# EAGLE board untitled (EAGLE 9.6.2)
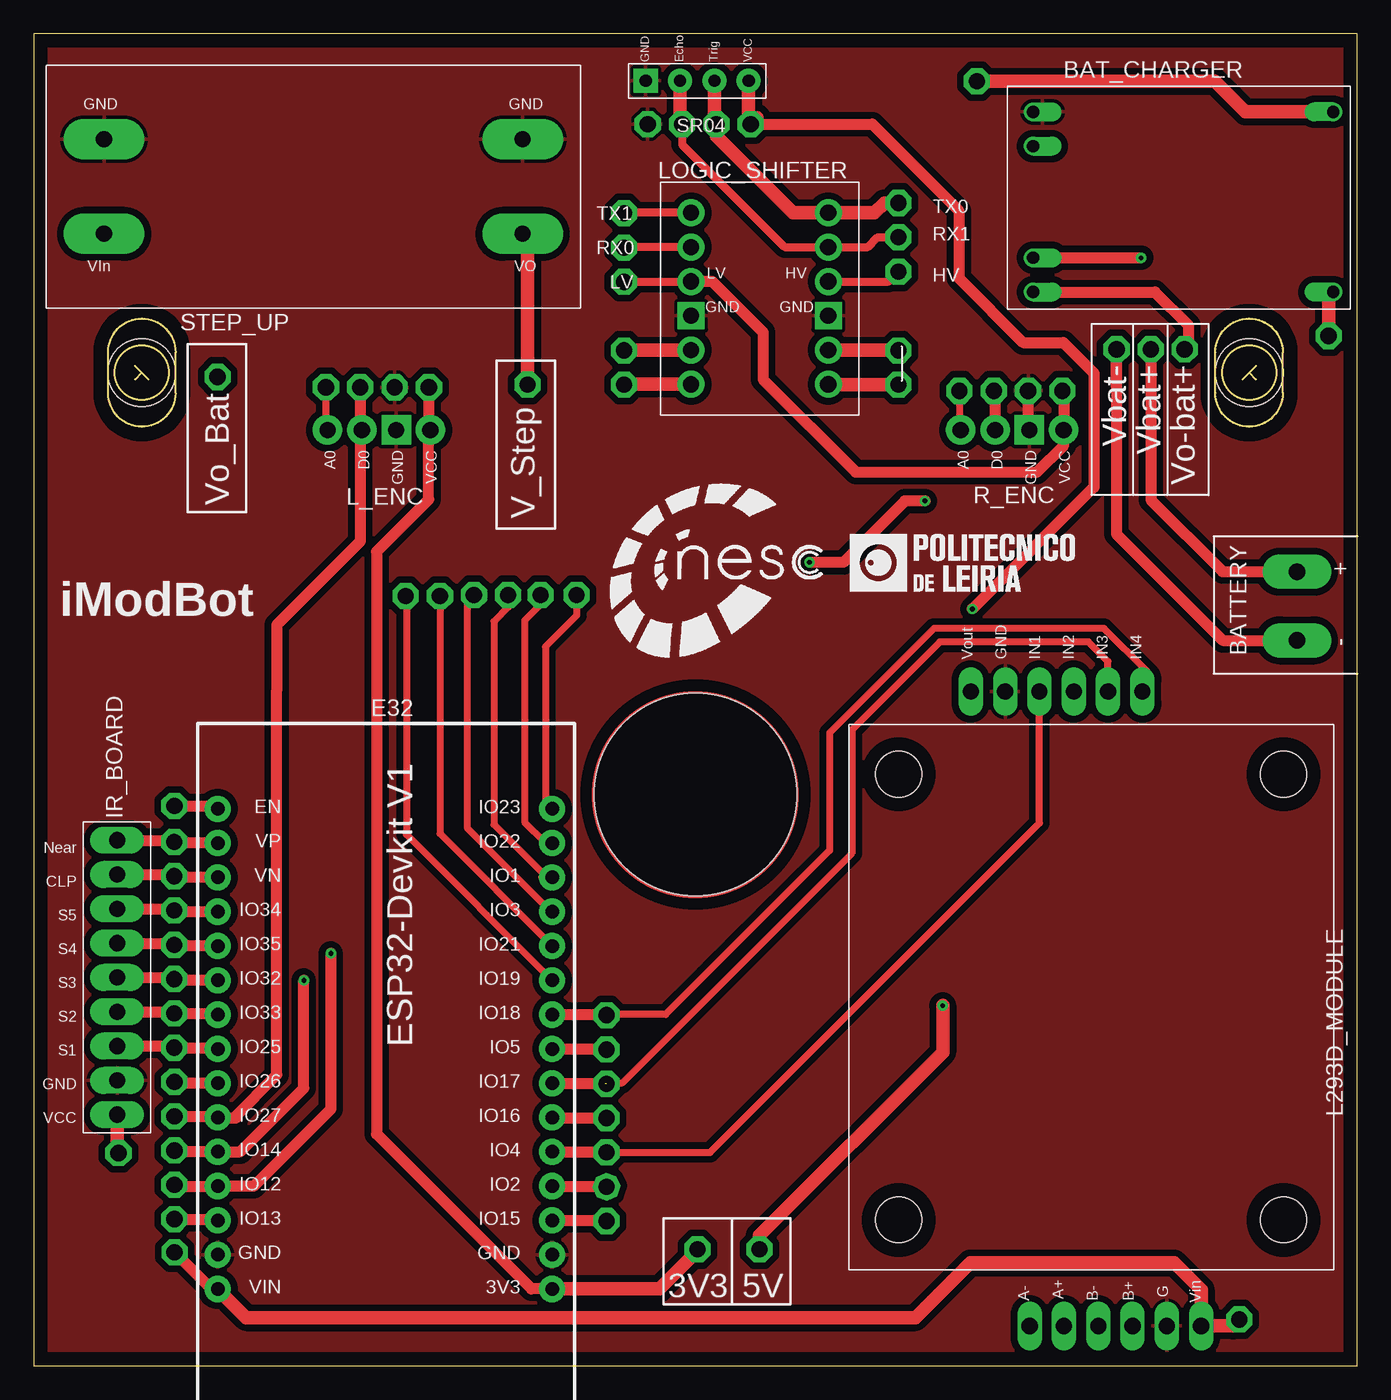
[diagram p0: board, top side]
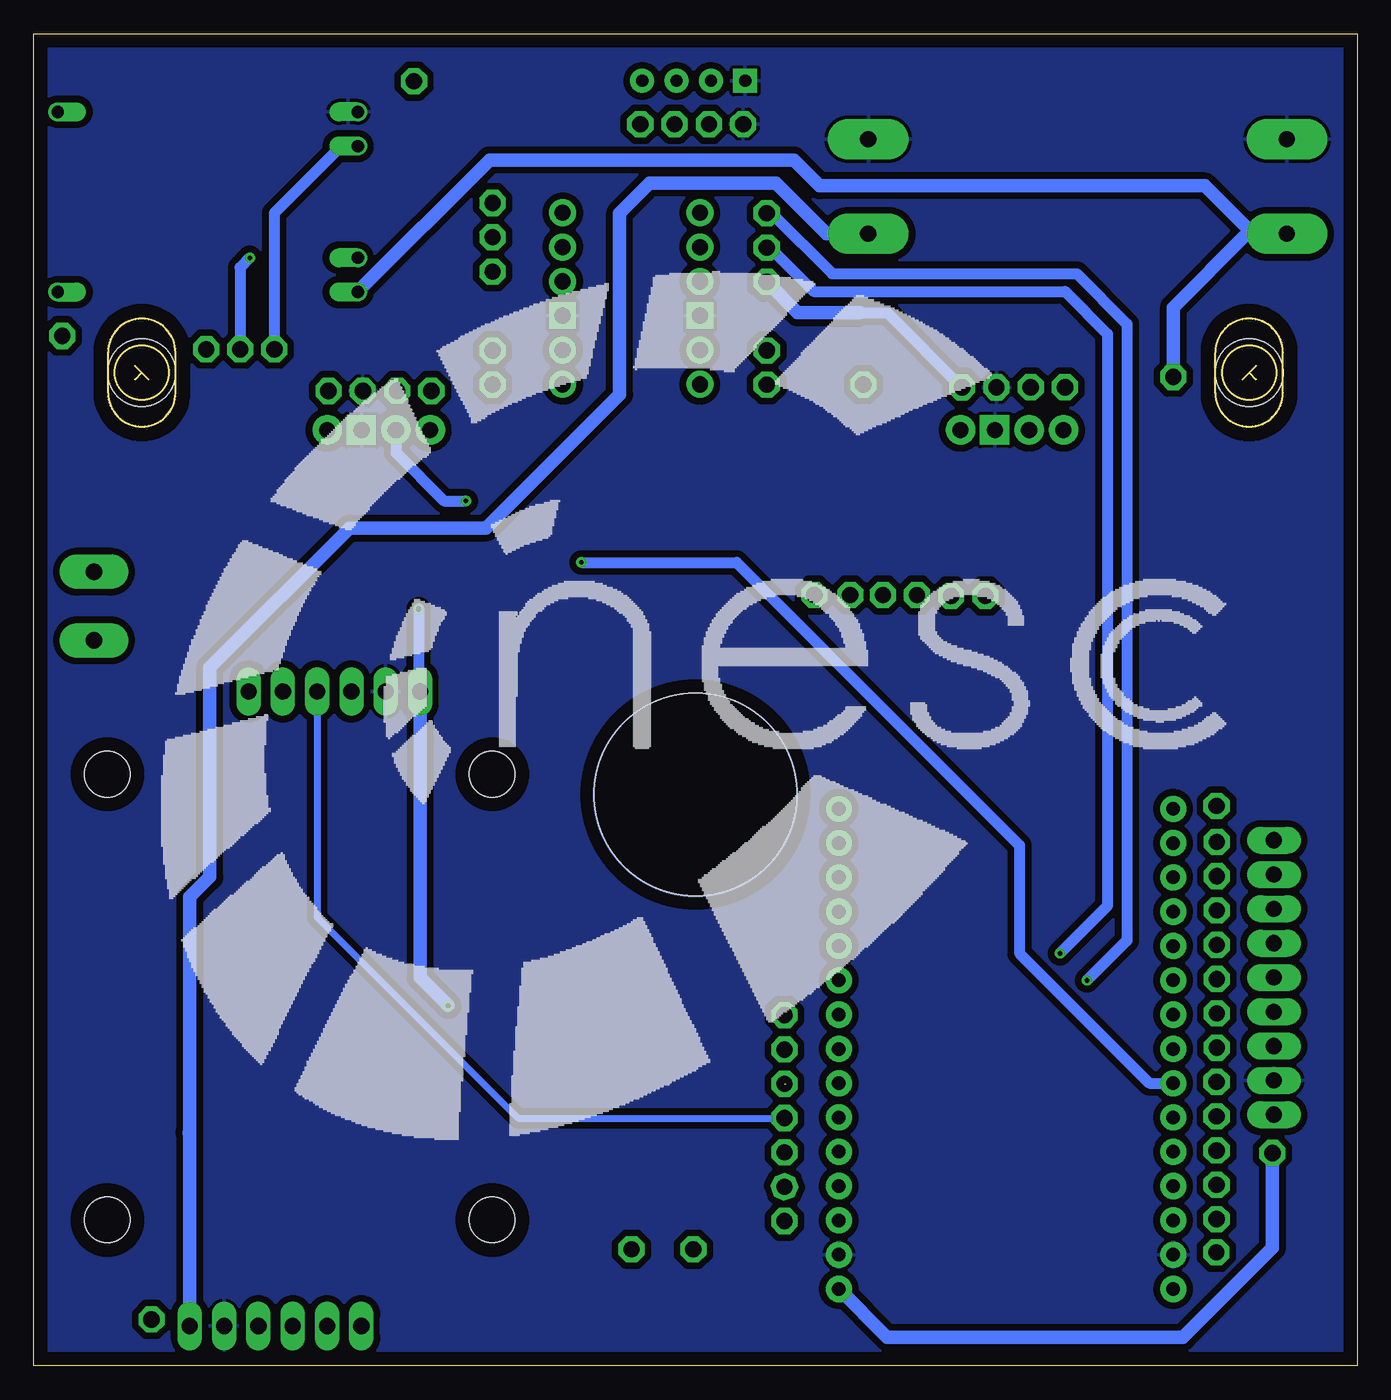
[diagram p1: board, bottom side, seen from below]

Size 98 x 98.64 mm. Coordinates in mm from the lower left corner, seen from the top.
Outline: 7.5,74.04 8,73.54
Outline: 8,73.54 8.5,73.04
Outline: 8,73.54 7.5,73.04
Outline: 90,73.54 90.5,73.04
Outline: 90.5,74.04 90,73.54
Outline: 90,73.54 89.5,73.04
Outline: 0,0 98,0 98,98.64 0,98.64 0,0
Outline: 5.5,72.04 5.5,75.04 arc-180 10.5,75.04 10.5,72.04 arc-180 5.5,72.04
Outline: 87.5,72.04 87.5,75.04 arc-180 92.5,75.04 92.5,72.04 arc-180 87.5,72.04
Outline: circle at 8,73.54 radius 2
Outline: circle at 90,73.54 radius 2
Copper layers (1*16): Top 0.035mm / dielectric 1.5mm / Bottom 0.035mm
Design rules "default *": minimum track width 6mil, minimum drill 0.35mm, track to track 0.5mm, track to pad 0.54mm, pad to pad 0.2mm, via to via 0.2mm, smd to smd 6mil, copper to edge 40mil, drill to drill 6mil, minimum pad ring 10mil, minimum via ring 8mil, stop-mask expansion 0.1mm, vias tented up to drill 0mil, thermal gap 10mil
Holes 15 mm at 49,42.29
Holes 5 mm at 8,73.54 90,73.54

## Footprints (pad centres in the part's own frame; a part is rotated, then mirrored left to right if it is on the bottom)
TP4056-LITHIUM-PROTECTED-MODULE = drill 0.9 offset: B+ 10.795,4.445; B- 10.795,-3.81; IN+ -11.43,6.985; IN- -11.43,-6.35; OUT+ 10.795,6.985; OUT- 10.795,-6.35
BAT_PAD = drill 1.2 pad 2.54 long: 1 0,2.54; 2 0,-2.54
ESP32-DEVKITV1 = drill 1 pad 1.93: 1 -22.87,-13.54; 2 -20.33,-13.54; 3 -17.79,-13.54; 4 -15.25,-13.54; 5 -12.71,-13.54; 6 -10.17,-13.54; 7 -7.63,-13.54; 8 -5.09,-13.54; 9 -2.55,-13.54; 10 -0.01,-13.54; 11 2.53,-13.54; 12 5.07,-13.54; 13 7.61,-13.54; 14 10.15,-13.54; 15 12.69,-13.54; 16 12.69,11.23; 17 10.15,11.23; 18 7.61,11.23; 19 5.07,11.23; 20 2.53,11.23; 21 -0.01,11.23; 22 -2.55,11.23; 23 -5.09,11.23; 24 -7.63,11.23; 25 -10.17,11.23; 26 -12.71,11.23; 27 -15.25,11.23; 28 -17.79,11.23; 29 -20.33,11.23; 30 -22.87,11.23
IRB = drill 1.2 pad 2 long: 1 -10.16,0; 2 -7.62,0; 3 -5.08,0; 4 -2.54,0; 5 0,0; 6 2.54,0; 7 5.08,0; 8 7.62,0; 9 10.16,0
L293D_M = drill 1.2 long: 5 24.13,8.16; 6 24.13,5.62; 7 24.13,3.08; 8 24.13,0.54; 9 24.13,-2; 10 24.13,-4.54; 11 -22.86,-6.35; 12 -22.86,3.81; 13 -22.86,1.27; 14 -22.86,-1.27; 15 -22.86,-3.81; 16 -22.86,-8.89 | hole 3.4: -15,-15; 18,-15; -15,13.5; 18,13.5
ENCODER = drill 1.2 pad 2.184: 1 0,3.81; 3 0,-1.27; 4 0,-3.81 | drill 1.2 pad 2.184 square: 2 0,1.27
LLC = drill 1.2 pad 2: 1 -5.08,5.08; 2 -5.08,2.54; 3 -5.08,0; 5 -5.08,-5.08; 6 -5.08,-7.62; 7 5.08,-7.62; 8 5.08,-5.08; 10 5.08,0; 11 5.08,2.54; 12 5.08,5.08 | drill 1.2 pad 2 square: 4 -5.08,-2.54; 9 5.08,-2.54
HC-SR04_FOOTPRINT = drill 0.9 pad 1.778: ECHO 0,1.27; TRIG 0,-1.27; VCC 0,-3.81 | drill 0.9 pad 1.778 square: GND 0,3.81
STEPUP = drill 1.2 pad 3 long: 1 -15.5,3.5; 2 -15.5,-3.5; 3 15.5,-3.5; 4 15.5,3.5
TP = drill 1.2 pad 1.93 octagon: P$1 0,0

## Placement (x,y rotation side)
BAT_CHARGER  TP4056-MODULE  [TP4056-LITHIUM-PROTECTED-MODULE]  84.8,86.5 180 top
BATTERY  BAT_PAD  [BAT_PAD]  93.54,56.26 0 top
E32  ESP32DEVKITV1  [ESP32-DEVKITV1]  24.85,28.55 90 top
IR_BOARD  IRB  [IRB]  6.17,28.75 90 top
L293D_MODULE  L293D_M  [L293D_M]  77.56,25.8 90 top
L_ENC  ENCODER  [ENCODER]  25.56,69.29 270 top
LOGIC_SHIFTER  LLC  [LLC]  53.75,80.3 0 top
R_ENC  ENCODER  [ENCODER]  72.45,69.29 270 top
SR04  HC-SR04  [HC-SR04_FOOTPRINT]  49.13,95.15 90 top
STEP_UP  STEPUP  [STEPUP]  20.7,87.32 180 top
U$1  TP  [TP]  89.28,3.43 0 top
U$2  TP  [TP]  53.73,8.63 0 top
U$3  TP  [TP]  76.18,72.19 0 top
U$4  TP  [TP]  73.64,72.19 0 top
U$8  TP  [TP]  43.72,80.26 0 top
U$10  TP  [TP]  42.42,10.72 90 top
U$11  TP  [TP]  42.42,13.26 70.3 top
U$12  TP  [TP]  42.42,18.34 0 top
U$13  TP  [TP]  42.42,20.88 0 top
U$14  TP  [TP]  42.42,23.42 0 top
U$15  TP  [TP]  42.42,25.96 90 top
U$16  TP  [TP]  27.53,57 0 top
U$17  TP  [TP]  30.07,57 0 top
U$18  TP  [TP]  32.59,57.08 0 top
U$19  TP  [TP]  35.13,57.08 0 top
U$20  TP  [TP]  37.54,57.08 0 top
U$21  TP  [TP]  40.2,57.07 0 top
U$22  TP  [TP]  10.41,41.45 0 top
U$23  TP  [TP]  10.39,38.79 90 top
U$24  TP  [TP]  10.39,36.25 90 top
U$25  TP  [TP]  10.39,33.71 90 top
U$26  TP  [TP]  10.39,31.17 90 top
U$27  TP  [TP]  10.39,28.63 90 top
U$28  TP  [TP]  10.39,26.09 90 top
U$29  TP  [TP]  10.39,23.55 0 top
U$30  TP  [TP]  24.17,72.46 0 top
U$31  TP  [TP]  71.1,72.19 0 top
U$32  TP  [TP]  10.41,15.94 0 top
U$33  TP  [TP]  10.41,13.4 0 top
U$34  TP  [TP]  10.41,10.86 0 bottom
U$36  TP  [TP]  36.58,72.64 0 top
U$37  TP  [TP]  95.89,76.26 0 top
U$38  TP  [TP]  69.85,95.12 0 top
U$40  TP  [TP]  80.19,75.27 0 top
U$41  TP  [TP]  82.72,75.27 0 bottom
U$42  TP  [TP]  85.22,75.27 0 top
U$43  TP  [TP]  13.61,73.23 0 top
U$44  TP  [TP]  10.42,8.39 0 top
U$46  TP  [TP]  42.42,15.8 0 top
U$47  TP  [TP]  10.41,18.48 0 top
U$48  TP  [TP]  21.63,72.46 0 top
U$49  TP  [TP]  49.16,8.63 0 top
U$50  TP  [TP]  45.47,91.95 0 top
U$51  TP  [TP]  29.25,72.45 0 top
U$52  TP  [TP]  26.71,72.45 0 top
U$53  TP  [TP]  68.56,72.19 0 top
U$54  TP  [TP]  10.41,21.02 0 top
U$55  TP  [TP]  43.72,85.34 0 top
U$56  TP  [TP]  43.72,82.8 0 top
U$57  TP  [TP]  6.27,15.75 90 top
U$59  TP  [TP]  43.72,75.18 0 top
U$60  TP  [TP]  43.72,72.64 0 top
U$61  TP  [TP]  64.02,72.64 0 top
U$62  TP  [TP]  64.02,75.18 0 top
U$63  TP  [TP]  64.02,81.03 0 top
U$64  TP  [TP]  64.02,83.57 0 top
U$65  TP  [TP]  64.02,86.11 0 top
U$67  TP  [TP]  48.01,91.95 0 top
U$68  TP  [TP]  50.55,91.95 0 top
U$69  TP  [TP]  53.09,91.95 0 top

## Library data of the parts
BAT_CHARGER = UserLib
BATTERY IR_BOARD L293D_MODULE L_ENC LOGIC_SHIFTER R_ENC STEP_UP U$1-U$4 U$8 U$10-U$34 U$36-U$38 U$40-U$44 U$46-U$57 U$59-U$65 U$67-U$69 = edurobotParts
E32 = ESP32-DEVKITV1
SR04 = Ultrasonic Sensor HC-SR04

## Nets
+3V3: E32.1 IR_BOARD.1 L_ENC.1 LOGIC_SHIFTER.3 R_ENC.1 U$3.P$1 U$8.P$1 U$49.P$1 U$51.P$1 U$57.P$1
+5V: L293D_MODULE.5 SR04.VCC U$2.P$1 U$69.P$1
GND: BAT_CHARGER.OUT- E32.2 E32.29 IR_BOARD.2 L293D_MODULE.6 L293D_MODULE.11 L_ENC.2 LOGIC_SHIFTER.4 LOGIC_SHIFTER.9 R_ENC.2 SR04.GND STEP_UP.2 STEP_UP.3 U$4.P$1 U$50.P$1 U$52.P$1
N$2: E32.5 L293D_MODULE.7 U$46.P$1
N$3: E32.6 L293D_MODULE.8 U$12.P$1
N$4: E32.7 L293D_MODULE.9 U$13.P$1
N$5: E32.9 L293D_MODULE.10 U$15.P$1
N$6: BAT_CHARGER.B+ BATTERY.1 U$41.P$1
N$7: BAT_CHARGER.B- BATTERY.2 U$40.P$1
N$8: BAT_CHARGER.OUT+ STEP_UP.4 U$42.P$1 U$43.P$1
N$9: E32.23 IR_BOARD.3 U$29.P$1
N$10: E32.22 IR_BOARD.4 U$28.P$1
N$11: E32.21 IR_BOARD.5 U$27.P$1
N$12: E32.20 IR_BOARD.6 U$26.P$1
N$13: E32.19 IR_BOARD.7 U$25.P$1
N$14: E32.17 IR_BOARD.9 U$23.P$1
N$15: E32.18 IR_BOARD.8 U$24.P$1
N$16: E32.27 LOGIC_SHIFTER.2 U$33.P$1 U$56.P$1
N$17: E32.26 LOGIC_SHIFTER.1 U$32.P$1 U$55.P$1
N$18: LOGIC_SHIFTER.12 SR04.TRIG U$65.P$1 U$68.P$1
N$19: LOGIC_SHIFTER.11 SR04.ECHO U$64.P$1 U$67.P$1
N$20: E32.24 R_ENC.3 U$31.P$1 U$54.P$1
N$21: E32.25 L_ENC.3 U$30.P$1 U$47.P$1
N$22: E32.15 U$21.P$1
N$23: E32.3 U$10.P$1
N$24: E32.4 U$11.P$1
N$25: E32.8 U$14.P$1
N$26: E32.10 U$16.P$1
N$27: E32.11 U$17.P$1
N$28: E32.12 U$18.P$1
N$29: E32.13 U$19.P$1
N$30: E32.14 U$20.P$1
N$32: E32.16 U$22.P$1
N$33: E32.28 U$34.P$1
N$35: BAT_CHARGER.IN- U$38.P$1
N$36: BAT_CHARGER.IN+ U$37.P$1
N$37: LOGIC_SHIFTER.5 U$59.P$1
N$38: LOGIC_SHIFTER.6 U$60.P$1
N$39: LOGIC_SHIFTER.7 U$61.P$1
N$40: LOGIC_SHIFTER.8 U$62.P$1
N$41: LOGIC_SHIFTER.10 U$63.P$1
N$42: R_ENC.4 U$53.P$1
N$43: L_ENC.4 U$48.P$1
V+: E32.30 L293D_MODULE.16 STEP_UP.1 U$1.P$1 U$36.P$1 U$44.P$1

## Tracks (layer width: path | path; a pad name or v marks a point on that pad's centre or on a via)
+3V3
  Top 0.61: U$8.P$1 43.75,80.3 LOGIC_SHIFTER.3
  Top 0.813: 76.39,71.98 U$3.P$1 76.27,72.11 R_ENC.1 76.27,68.15 74.28,66.16 60.88,66.16 54,73.04 54,76.54 50.24,80.3 LOGIC_SHIFTER.3 | U$51.P$1 29.25,69.41 | 29.25,69.41 L_ENC.1 | E32.1 36.86,5.68 25.38,17.16 25.38,60.29 29.25,64.16 29.25,69.41
  Top 1.016: U$49.P$1 49.16,8.5 46.34,5.68 E32.1 | IR_BOARD.1 6.17,15.85 U$57.P$1
  Bottom 0.813: 36.82,77.98 34.78,77.98 U$51.P$1
  Bottom 1.016: U$57.P$1 6.27,8.74 12.91,2.1 34.81,2.1 E32.1 | U$8.P$1 41.43,77.98 36.82,77.98
+5V  (via drill 0.35)
  Top 0.813: U$69.P$1 62.09,91.95 68.5,85.54 68.5,80.54 73.26,75.78 76.24,75.78 78.51,73.5 78.51,65.05 v69.5,56.04
  Top 1.016: SR04.VCC 52.94,92.09 U$69.P$1 53.56,92.42 | v67.31,26.67 67.31,23.22 53.73,9.64 U$2.P$1
  Bottom 0.813: v69.5,56.04 69.5,50.03 L293D_MODULE.5
  Bottom 1.016: L293D_MODULE.5 69.4,28.76 v67.31,26.67
GND
  Top 0.813: R_ENC.2 73.64,69.38 U$4.P$1
  pour Top: 0,0 98,0 98,98.64 0,98.64
  pour Bottom: 0,0 98.04,0 98.04,98.68 0,98.68
N$2
  Top 0.508: U$46.P$1 50.09,15.8 74.48,40.19 L293D_MODULE.7
  Top 0.813: E32.5 42.37,15.84 U$46.P$1
N$3
  Top 0.813: U$12.P$1 38.44,18.34 E32.6
  Bottom 0.508: L293D_MODULE.8 77.02,33.2 62.15,18.34 U$12.P$1
N$4  (1 unrouted)
  Top 0.152: U$13.P$1 42.37,20.92
  Top 0.508: L293D_MODULE.9 79.56,52.15 78.11,53.6 67.09,53.6 60.58,47.09 60.58,37.95 43.55,20.92 42.37,20.92
  Top 0.813: E32.7 42.37,20.92 | 42.29,20.88 42.24,20.92
N$5
  Top 0.508: L293D_MODULE.10 82.1,51.07 82.45,51.42 79.25,54.61 66.67,54.61 58.94,46.87 58.94,38.14 46.8,26 42.37,26
  Top 0.813: E32.9 42.37,26 U$15.P$1
N$6  (via drill 0.35)
  Top 0.813: 82.72,73.55 U$41.P$1 82.72,64.12 88.04,58.8 BATTERY.1 | BAT_CHARGER.B+ 81.99,82.05 v82,82.04
  Bottom 0.813: v82,82.04 82.72,81.32 U$41.P$1
N$7
  Top 0.813: 80.19,72.48 U$40.P$1 80.19,61.57 88.04,53.72 BATTERY.2
  Bottom 0.813: BAT_CHARGER.B- 75.23,90.31 80.19,85.36 U$40.P$1
N$8
  Top 0.813: BAT_CHARGER.OUT+ 83.03,79.51 85.5,77.04 85.5,75.55 U$42.P$1
  Bottom 1.016: U$43.P$1 13.61,78.37 8.15,83.82 STEP_UP.4 7.74,83.82 11.3,87.38 39.81,87.38 41.72,89.28 64.26,89.28 74,79.54 BAT_CHARGER.OUT+
N$9
  Top 0.813: IR_BOARD.3 10.27,23.67 U$29.P$1 13.53,23.55 E32.23
N$10
  Top 0.152: E32.22 10.71,26 10.5,26.21
  Top 0.305: U$28.P$1 11.43,26.09
  Top 0.813: IR_BOARD.4 10.5,26.21 10.92,26.21 | 11.43,26.09 13.53,26.09 E32.22
N$11
  Top 0.813: E32.21 10.48,28.54 U$27.P$1 10.27,28.75 IR_BOARD.5
N$12
  Top 0.813: E32.20 10.48,31.08 U$26.P$1 10.27,31.29 IR_BOARD.6
N$13
  Top 0.813: IR_BOARD.7 10.27,33.83 U$25.P$1 10.48,33.62 E32.19
N$14
  Top 0.813: IR_BOARD.9 10.27,38.91 U$23.P$1 10.48,38.7 E32.17
N$15
  Top 0.813: IR_BOARD.8 10.27,36.37 U$24.P$1 10.48,36.16 E32.18
N$16  (via drill 0.35)
  Top 0.61: LOGIC_SHIFTER.2 43.75,82.84 U$56.P$1
  Top 0.813: U$33.P$1 10.51,13.3 E32.27 16.3,13.3 22,19 v22,30.54
  Bottom 0.813: U$56.P$1 43.5,82.8 40.23,79.54 21.62,79.54 18.48,76.41 18.48,34.05 v22,30.54
N$17  (via drill 0.35)
  Top 0.61: LOGIC_SHIFTER.1 43.75,85.38 U$55.P$1
  Top 0.813: U$32.P$1 10.51,15.84 E32.26 15.29,15.84 20,20.56 v20,28.54
  Bottom 0.813: U$55.P$1 43.36,85.34 38.87,80.85 20.75,80.85 17.05,77.15 17.05,31.49 v20,28.54
N$18
  Top 1.016: SR04.TRIG 50.4,92.09 U$68.P$1 50.55,91.06 56.23,85.38 LOGIC_SHIFTER.12 62.26,85.38 62.99,86.11 U$65.P$1
N$19
  Top 0.61: U$67.P$1 48.01,90.42 55.59,82.84 LOGIC_SHIFTER.11 61.75,82.84 62.48,83.57 U$64.P$1
  Top 1.016: SR04.ECHO 47.86,92.09 U$67.P$1
N$20  (via drill 0.35)
  Top 0.813: E32.24 10.51,20.92 U$54.P$1 | U$31.P$1 71.19,72.11 R_ENC.3 | v66,64.04 64.5,64.04 59.95,59.49 v57.45,59.49
  Bottom 0.813: R_ENC.3 71.19,67.61 67.62,64.04 v66,64.04 | E32.24 15.38,20.92 25,30.54 25,38.54 45.95,59.49 v57.45,59.49
N$21
  Top 0.813: U$47.P$1 13.53,18.48 E32.25 13.67,18.34 14.8,18.34 | 14.99,18.34 14.8,18.34 | 14.8,18.34 18,21.54 18,50.04 18,54.87 24.17,61.04 24.17,69.22 | U$30.P$1 24.17,69.22 | 24.17,69.22 24.6,68.79 24.6,68.98 L_ENC.3
N$22
  Top 0.508: U$21.P$1 40.2,55.57 37.89,53.26 37.89,41.74 E32.15
N$23
  Top 0.813: E32.3 42.37,10.76 U$10.P$1
N$24
  Top 0.813: U$11.P$1 38.44,13.26 E32.4
N$25
  Top 0.813: U$14.P$1 38.44,23.42 E32.8
N$26
  Top 0.508: E32.10 27.6,39.34 27.6,56.94 U$16.P$1
  Top 0.813: 27.49,57.05 U$16.P$1
N$27
  Top 0.508: E32.11 30.07,39.4 U$17.P$1
  Top 0.813: 38.44,31.04 E32.11
N$28
  Top 0.508: 38.44,33.58 38.35,33.58 32.09,39.84 32.09,56.58 U$18.P$1
  Top 0.813: 38.44,33.58 E32.12
N$29
  Top 0.508: E32.13 38,36.16 34.08,40.08 34.08,55.12 35.13,56.16 U$19.P$1
  Top 0.813: E32.13 37.76,36.16
N$30
  Top 0.508: E32.14 37.89,38.7 36.36,40.23 36.36,55.2 37.54,56.38 U$20.P$1
N$32
  Top 0.813: U$22.P$1 13.41,41.45 E32.16
N$33
  Top 0.813: U$34.P$1 13.53,10.86 E32.28
N$35
  Top 1.016: U$38.P$1 87.45,95.12 89.73,92.85 BAT_CHARGER.IN-
N$36
  Top 1.016: U$37.P$1 95.89,79.17 BAT_CHARGER.IN+
N$37
  Top 1.016: U$59.P$1 43.75,75.22 LOGIC_SHIFTER.5
N$38
  Top 1.016: LOGIC_SHIFTER.6 43.75,72.68 U$60.P$1
N$39
  Top 1.016: U$61.P$1 58.87,72.64 LOGIC_SHIFTER.7
N$40
  Top 1.016: LOGIC_SHIFTER.8 63.99,75.22 U$62.P$1
N$41
  Top 0.61: LOGIC_SHIFTER.10 63.29,80.3 U$63.P$1
N$42
  Top 0.508: U$53.P$1 68.56,69.38 R_ENC.4
N$43
  Top 0.508: L_ENC.4 21.63,69.41 U$48.P$1
V+
  Top 0.152: E32.30 13.41,5.89
  Top 0.813: E32.30 13.13,5.68 U$44.P$1
  Top 1.016: STEP_UP.1 36.58,83.45 U$36.P$1 | 13.41,5.89 15.74,3.56 65.29,3.56 69.34,7.62 84.45,7.62 86.45,5.63 L293D_MODULE.16 88.79,2.94 U$1.P$1
  Bottom 1.016: STEP_UP.1 39.31,83.82 43.05,87.57 52.39,87.57 54.61,85.34 54.61,71.93 64.5,62.04 74.61,62.04 84.96,51.69 84.96,36.2 86.45,34.71 L293D_MODULE.16 86.45,17.11 86.49,17.27
(copper drawn outside any net)
  shapes: Bottom circle x1, Top circle x1

## Text on the board
tPlace: TX0 | TX1 | RX1 | RX0 | HV | LV | Vbat- | Vbat+ | Vo-bat+ | Vo_Bat | V_Step | 3V3 | 5V
tNames: iModBot